# Altium PCB digidisk.PcbDoc
Units mm, origin at the board's own origin, x right, y up, seen from the top; angles counter-clockwise.
Board outline 180 x 80 mm, 2 copper layers (Top Layer, Bottom Layer); 73 components, 52 nets, 238 pads, 37 vias.
Unrouted connection lines stored in the file: 3.
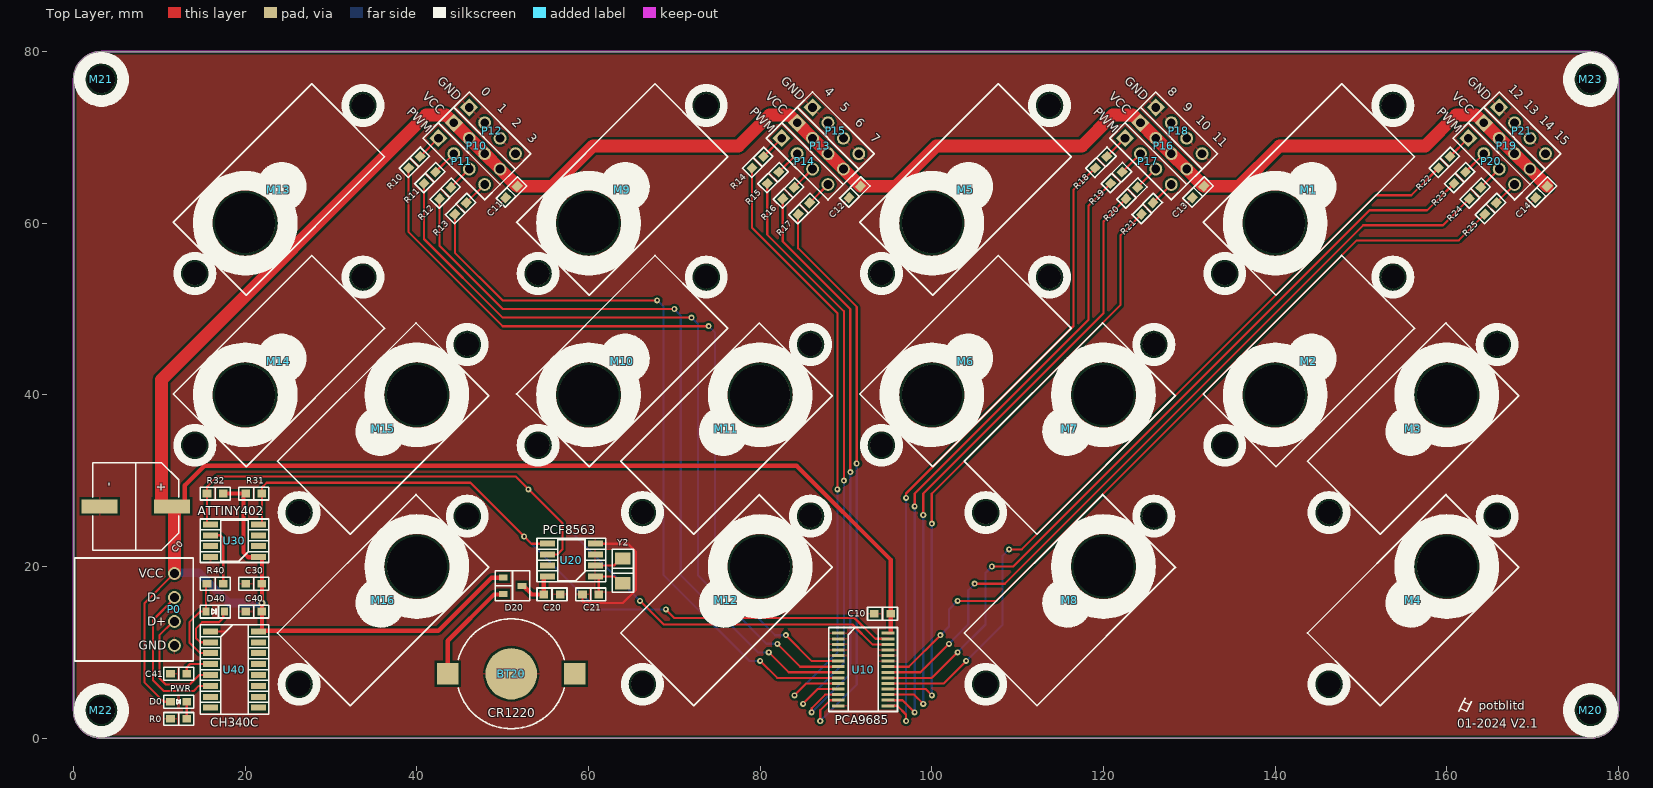
[diagram p0: Top Layer view]
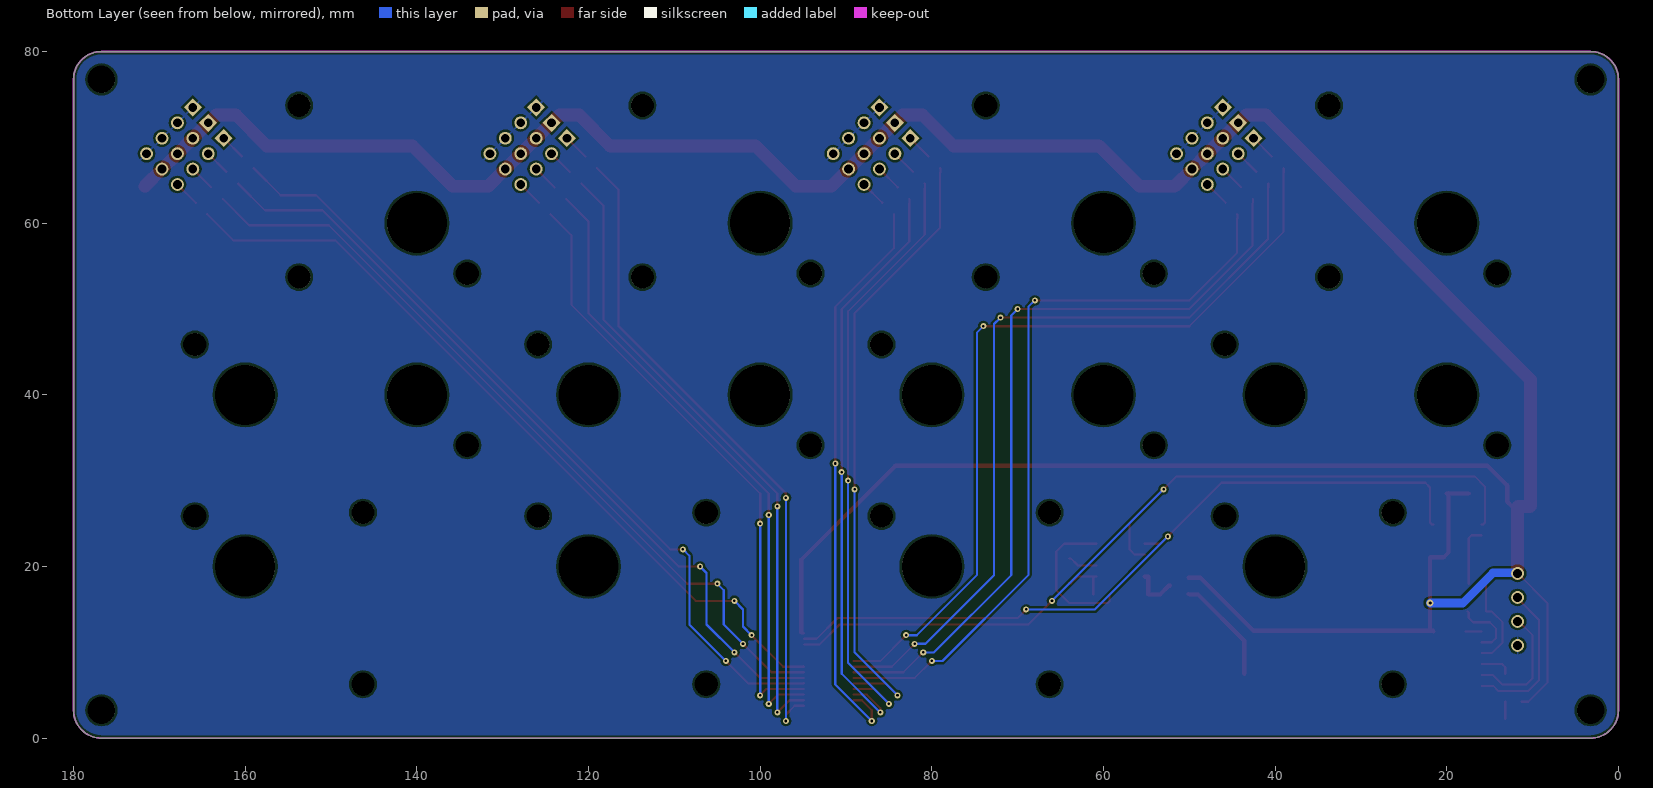
[diagram p1: Bottom Layer view, seen from below]
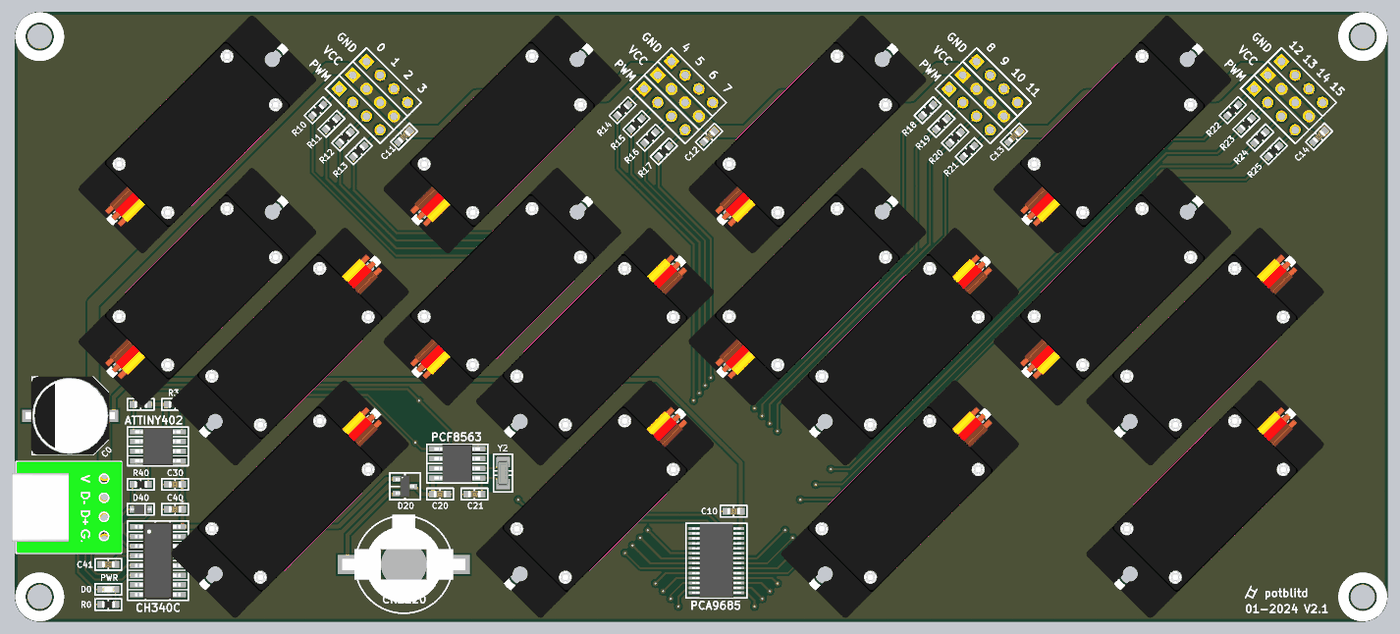
[diagram p2: 3D render of the assembled board from above, using the file's embedded part models]

## Layer stack, top to bottom
Top Solder: solder mask 0.0102, Solder Resist, Dk 3.5
Top Layer: signal copper 0.0356
Dielectric 1: dielectric 0.32, FR-4, Dk 4.8
Bottom Layer: signal copper 0.0356
Bottom Solder: solder mask 0.0102, Solder Resist, Dk 3.5

## Board outline
0,3.25 0,76.75 cw(c3.25,76.75) 3.25,80 176.75,80 cw(c176.75,76.75) 180,76.75 180,3.25 cw(c176.75,3.25) 176.75,0 3.25,0 cw(c3.25,3.25)

## Design rules (kind name [scope] priority, off if disabled: settings)
Clearance [All] p1: gap=0.254 ignorepadtopadclearanceinfootprint=FALSE except(0.15: Text-Text Text-Hole; 0.2: Arc-SMDPad Track-SMDPad)
Height [All] p1: minheight=0 maxheight=60 prefheight=12.7
HoleSize [All] p1: absolutevalues=TRUE maxlimit=30 minlimit=0.025 maxpercent=80.000 minpercent=20.000
MinimumSolderMaskSliver [All] p1: minsoldermaskwidth=0.2
PlaneConnect [All] p1: planeconnectstyle=Relief reliefexpansion=0.508 reliefentries=2 reliefconductorwidth=0.254 reliefairgap=0.254
PolygonConnect [All] p1: connectstyle=Relief reliefconductorwidth=0.254 reliefentries=2 polygonreliefangle="90 Angle" airgapwidth=0.254
RoutingVias [All] p1: holewidth=0.711 width=1.27 viastyle="Through Hole" minholewidth=0.711 minwidth=1.27 maxholewidth=0.711 maxwidth=1.27
SilkToSilkClearance [All] p1: silktosilkclearance=0.15
SilkToSolderMaskClearance [IsPad] p1: minsilkscreentomaskgap=0.15 clearancetoexposedcopper=TRUE
SolderMaskExpansion [All] p1: expansion=0.102 istentingtop=FALSE
Width [All] p1: maxlimit=2 minlimit=0.2 preferedwidth=0.254 minimp=50.000000 maximp=50.000000 favimp=50.000000
24 further rules are at their usual default settings.

## Components (designator, comment, footprint, x,y, rotation, side; value= is the part's Value field where it differs from the comment)
BT20 "CR1220" CR1220-H 51,7.5 r0 top value=3V
C0 "1000u" 10X10.2 7.25,27 r270 top
C10 "Capacitor" 0603CM 94.25,14.5 r180 top value=10u
C11 "Capacitor" 0603CM 51.022,63.634 r225 top value=10u
C12 "Capacitor" 0603CM 91.022,63.634 r225 top value=10u
C13 "Capacitor" 0603CM 131.022,63.634 r225 top value=10u
C14 "Capacitor" 0603CM 171.022,63.634 r225 top value=10u
C20 "Capacitor" 0603CM 55.75,16.75 r0 top value=100n
C21 "Capacitor" 0603CM 60.25,16.75 r180 top value=22p
C30 "Capacitor" 0603CM 21,18 r0 top value=1u
C40 "Capacitor" 0603CM 21,14.75 r180 top value=100n
C41 "Capacitor" 0603CM 12.25,7.5 r180 top value=100n
D0 "LED-B" 0603DM 12.25,4.25 r0 top value=~3V
D20 "BAS40-05" "SOT23-3 M" 51.15,17.75 r270 top value=DD
D40 "NSR0240" "SOD-323 M" 16.5,14.75 r0 top value=SCH-D
M1 "MG90S" HOLE-SG90-2 140,60 r225 top locked
M2 "MG90S" HOLE-SG90-2 140,40 r225 top locked
M3 "MG90S" HOLE-SG90-2 160,40 r45 top locked
M4 "MG90S" HOLE-SG90-2 160,20 r45 top locked
M5 "MG90S" HOLE-SG90-2 100,60 r225 top locked
M6 "MG90S" HOLE-SG90-2 100,40 r225 top locked
M7 "MG90S" HOLE-SG90-2 120,40 r45 top locked
M8 "MG90S" HOLE-SG90-2 120,20 r45 top locked
M9 "MG90S" HOLE-SG90-2 60,60 r225 top locked
M10 "MG90S" HOLE-SG90-2 60,40 r225 top locked
M11 "MG90S" HOLE-SG90-2 80,40 r45 top locked
M12 "MG90S" HOLE-SG90-2 80,20 r45 top locked
M13 "MG90S" HOLE-SG90-2 20,60 r225 top locked
M14 "MG90S" HOLE-SG90-2 20,40 r225 top locked
M15 "MG90S" HOLE-SG90-2 40,40 r45 top locked
M16 "MG90S" HOLE-SG90-2 40,20 r45 top locked
M20 "M3" HOLE-M3-simple 176.75,3.25 r0 top locked value=3.1mm
M21 "M3" HOLE-M3-simple 3.25,76.75 r0 top locked value=3.1mm
M22 "M3" HOLE-M3-simple 3.25,3.25 r0 top locked value=3.1mm
M23 "M3" HOLE-M3-simple 176.75,76.75 r0 top locked value=3.1mm
P0 "USB-C" "USB-C module 2.8mm" 11.75,15 r270 top value=4P
P10 "4P2.54MM" 4P-2.54mm 47,69 r315 top value=4P
P11 "4P2.54MM" 4P-2.54mm 45.204,67.204 r315 top value=4P
P12 "4P2.54MM" 4P-2.54mm 48.796,70.796 r315 top value=4P
P13 "4P2.54MM" 4P-2.54mm 87,69 r315 top value=4P
P14 "4P2.54MM" 4P-2.54mm 85.204,67.204 r315 top value=4P
P15 "4P2.54MM" 4P-2.54mm 88.796,70.796 r315 top value=4P
P16 "4P2.54MM" 4P-2.54mm 127,69 r315 top value=4P
P17 "4P2.54MM" 4P-2.54mm 125.204,67.204 r315 top value=4P
P18 "4P2.54MM" 4P-2.54mm 128.796,70.796 r315 top value=4P
P19 "4P2.54MM" 4P-2.54mm 167,69 r315 top value=4P
P20 "4P2.54MM" 4P-2.54mm 165.204,67.204 r315 top value=4P
P21 "4P2.54MM" 4P-2.54mm 168.796,70.796 r315 top value=4P
R0 "Resistor" 0603RM 12.25,2.25 r0 top value=100
R10 "Resistor" 0603RM 39.71,67.098 r225 top value=220
R11 "Resistor" 0603RM 41.506,65.302 r225 top value=220
R12 "Resistor" 0603RM 43.302,63.506 r225 top value=220
R13 "Resistor" 0603RM 45.098,61.71 r225 top value=220
R14 "Resistor" 0603RM 79.71,67.098 r225 top value=220
R15 "Resistor" 0603RM 81.506,65.302 r225 top value=220
R16 "Resistor" 0603RM 83.302,63.506 r225 top value=220
R17 "Resistor" 0603RM 85.098,61.71 r225 top value=220
R18 "Resistor" 0603RM 119.71,67.098 r225 top value=220
R19 "Resistor" 0603RM 121.506,65.302 r225 top value=220
R20 "Resistor" 0603RM 123.302,63.506 r225 top value=220
R21 "Resistor" 0603RM 125.098,61.71 r225 top value=220
R22 "Resistor" 0603RM 159.71,67.098 r225 top value=220
R23 "Resistor" 0603RM 161.506,65.302 r225 top value=220
R24 "Resistor" 0603RM 163.302,63.506 r225 top value=220
R25 "Resistor" 0603RM 165.098,61.71 r225 top value=220
R31 "Resistor" 0603RM 21,28.5 r180 top value=10k
R32 "Resistor" 0603RM 16.5,28.5 r0 top value=10k
R40 "Resistor" 0603RM 16.5,18 r180 top value=470
U10 "PCA9685" "TSSOP-28 M" 92,8 r0 top value=TSSOP-28
U20 "PCF8563" "SOP-8 M" 58,20.75 r90 top value=SOP-8
U30 "ATtiny402" "SOP-8 M" 18.75,23 r90 top value=SOP-8
U40 "CH340C" "SOP-16 M" 18.75,8 r270 top value=USB-TTL
Y2 "Oscillator" "FC135 M" 64,19.5 r270 top value=32.768kHz

## Footprints (in the part's own frame and the unit in brackets; to place one, negate y for a bottom-side part, rotate by r counter-clockwise, add the part's x,y. Pads: shape width x height; smd on the part's side, far side on the other; paste and mask are expansions set on the pad)
4P-2.54mm [mm] "4-pin 2.54mm thru hole general footprint"
  rect 1.5x1.5 hole 1.02 mask+0.05: 1(-3.81,0)
  round 1.5 hole 1.02 mask+0.05: 2(-1.27,0) 3(1.27,0) 4(3.81,0)
  silkscreen extent -5.08,-1.27 5.08,1.27
10X10.2 [mm] "Electrolytic capacitor d10-h10.2 general footprint"
  rect 1.6x4.2 smd mask+0.05: 1(0,4.2) 2(0,-4.2)
  silkscreen extent -5.1,-5 5.1,5, body extent -5.15,-5.85 5.15,5.85, height 10.3
0603CM [mm] "0603 capacitor for manual soldering"
  rect 1x0.9 smd mask+0.05: 1(-0.95,0) 2(0.95,0)
  silkscreen extent -1.75,-0.75 1.75,0.75, body extent -0.85,-0.45 0.85,0.45, height 0.9
0603DM [mm] "0603/1608 SMD LED general footprint"
  rect 1x0.9 smd mask+0.05: 1(-0.95,0) 2(0.95,0)
  silkscreen extent -1.75,-0.75 1.75,0.75, body extent -0.8,-0.4 0.8,0.4, height 0.55
0603RM [mm] "0603 resistor for manual soldering"
  rect 1x0.9 smd mask+0.05: 1(-0.95,0) 2(0.95,0)
  silkscreen extent -1.75,-0.75 1.75,0.75, body extent -0.85,-0.45 0.85,0.45, height 0.55
CR1220-H [mm] "CR1220 SMD battery holder"
  rect 2.5x2.5 smd mask+0.05: 1(-7.4,0) 1(7.4,0)
  round 6 smd mask+0.05: 2(0,0)
  silkscreen extent -6.18,-6.4 6.18,6.4, body extent -8.08,-5 8.08,6.55, height 2.3
"FC135 M" [mm] "1206 oscillator for manual soldering"
  rect 1.4x1.8 smd mask+0.05: 1(-1.45,0) 2(1.45,0)
  silkscreen extent -2.5,-1.25 2.5,1.25, body extent -1.6,-0.75 1.6,0.75, height 0.9
HOLE-M3-simple [mm] "Hole for M3 screw"
  round 3.1 hole 3.2 mask+0.05: 1(0,0)
HOLE-SG90-2 [mm]
  round 2.6 hole 2.7 unplated mask+0: 1(-19.4,0) 1(8.3,0)
  round 6.9 hole 7 unplated mask+0: 1(0,0)
  silkscreen extent -21.45,-6 10.35,6, body extent -21.8,-6.15 10.7,6.15, height 28.39
"SOD-323 M" [mm] "Diode footprint"
  rect 0.8x0.9 smd mask+0.05: 1(-1.075,0) 2(1.075,0)
  silkscreen extent -1.75,-0.75 1.75,0.75, body extent -1.34,-0.65 1.34,0.65, height 1.15
"SOP-8 M" [mm] "SOP-8 for manual soldering"
  rect 0.7x1.75 smd mask+0.05: 1(-1.905,-2.8) 2(-0.635,-2.8) 3(0.635,-2.8) 4(1.905,-2.8) 5(1.905,2.8) 6(0.635,2.8) 7(-0.635,2.8) 8(-1.905,2.8)
  silkscreen extent -2.54,-4 2.54,4, body extent -2.45,-3 2.45,3, height 1.75
"SOP-16 M" [mm]
  rect 0.7x1.75 smd mask+0.05: 1(-4.445,-2.8) 2(-3.175,-2.8) 3(-1.905,-2.8) 4(-0.635,-2.8) 5(0.635,-2.8) 6(1.905,-2.8) 7(3.175,-2.8) 8(4.445,-2.8) 9(4.445,2.8) 10(3.175,2.8) 11(1.905,2.8) 12(0.635,2.8) 13(-0.635,2.8) 14(-1.905,2.8) 15(-3.175,2.8) 16(-4.445,2.8)
  silkscreen extent -5.2,-4 5.2,4, body extent -5,-3 5,3, height 1.8
"SOT23-3 M" [mm] "SOT23-3 for manual soldering"
  rect 0.7x1 smd mask+0.05: 1(-0.95,-1.1) 2(0.95,-1.1) 3(0,1.1)
  silkscreen extent -1.75,-2 1.75,2, body extent -1.45,-1.2 1.45,1.2, height 1.1
"TSSOP-28 M" [mm]
  rect 1.5x0.35 smd mask+0.01: 1(-2.9,4.225) 2(-2.9,3.575) 3(-2.9,2.925) 4(-2.9,2.275) 5(-2.9,1.625) 6(-2.9,0.975) 7(-2.9,0.325) 8(-2.9,-0.325) 9(-2.9,-0.975) 10(-2.9,-1.625) 11(-2.9,-2.275) 12(-2.9,-2.925) 13(-2.9,-3.575) 14(-2.9,-4.225) 15(2.9,-4.225) 16(2.9,-3.575) 17(2.9,-2.925) 18(2.9,-2.275) 19(2.9,-1.625) 20(2.9,-0.975) 21(2.9,-0.325) 22(2.9,0.325) 23(2.9,0.975) 24(2.9,1.625) 25(2.9,2.275) 26(2.9,2.925) 27(2.9,3.575) 28(2.9,4.225)
  silkscreen extent -4,-4.9 4,4.9, body extent -3.2,-4.85 3.2,4.85, height 1.1
"USB-C module 2.8mm" [mm]
  round 1.5 hole 1.02 mask+0.05: 1(-4.2,0) 2(-1.4,0) 3(1.4,0) 4(4.2,0)
  silkscreen extent -6,-11.6 6,2.2, body extent -6,-12.13 6,2.23, height 4

## Part data
BT20: library part "Battery 3V", "Coin cell battery 3V", Component=CR1220
C0: library part PCapacitor, "Electrolytic Capacitor", Component=Cap10x10.2
C10 C11 C12 C13 C14: "Capacitor 10u", Component=Cap0603
C20 C40 C41: "Capacitor 100nF ±10% 50V", Component=Cap0603
C21: "Capacitor 22pF ±5% 50V", Component=Cap0603
C30: "Capacitor 1uF", Component=Cap0603
D0: "General LED symbol", Component=LED-B
D20: library part "Dual Diode 2", "General symbol for a dual diode", Component=BAS40-05
D40: library part "Schottky Diode", "Schottky Barrier Rectifiers", Component=NSR0240
M1 M2 M3 M4 M5 M6 M7 M8 M9 M10 M11 M12 M13 M14 M15 M16 M20 M21 M22 M23: library part "Mounting Hole noGD", "Genreal symbol for mechanical mounting hole"
  M1 M2 M3 M4 M5 M6 M7 M8 M9 M10 M11 M12 M13 M14 M15 M16: Component=MG90S
  M20 M21 M22 M23: Component=M3
P0 P10 P11 P12 P13 P14 P15 P16 P17 P18 P19 P20 P21: library part "4-pins Header", "General 4-pin connection"
  P0: Component=4P-2.54MM
  P10 P11 P12 P13 P14 P15 P16 P17 P18 P19 P20 P21: Component=4P2.54MM
R0 R10 R11 R12 R13 R14 R15 R16 R17 R18 R19 R20 R21 R22 R23 R24 R25 R31 R32 R40: library part RES, Component=Res0603
U10: "16-channel, 12-bit PWM Fm+ I2C-bus LED controller", Component=PCA9685
U20: library part RTC-8563, "IC real-time clock with alarm interrupt", Component=PCF8563T
U30: library part ATtiny202/402, "tiny AVR 8-pin microcontroller", Component=ATtiny402
U40: library part CH340C-A, "USB to serial", Component=CH340C
Y2: library part XO-2, "Crystal oscillator 32.768kHz 20ppm 12.5pF", Component=FC135

## Via types
v1: diameter 0.7, hole 0.3, Top Layer to Bottom Layer, tented both sides, 36 vias
v2: diameter 0.8, hole 0.4, Top Layer to Bottom Layer, tented both sides, 1 vias

## Nets (pads, with @x,y where several pads share a name; then routed paths per layer and width w, separated by ;. In a path a pad name is that pad's centre, name@x,y a point inside that pad or via, vN(x,y) a via of type N, cw(c..) or ccw(c..) an arc to the next point about the centre after c; other vN are vias at no path point)
5V: C0.1 C10.1 C11.1 C12.1 C13.1 C14.1 C30.2 C40.1 D0.1 D20.1 P0.1 P10.1 P10.2 P10.3 P10.4 P13.1 P13.2 P13.3 P13.4 P16.1 P16.2 P16.3 P16.4 P19.1 P19.2 P19.3 P19.4 R31.2 R32.2 U10.28 U30.1 U40.16 | length 403.6
  Top Layer w0.25: U10.28 U10.28@95.15,12.225
  Top Layer w0.254: D0.1 10.5,4.25 8.25,6.5 8.25,15.7 P0.1@11.75,19.2
  Top Layer w0.5: C0.1 11.7,27 12.407,27 12.957,27.55 12.957,29.457 15.25,31.75 84.25,31.75 95.2,20.8 C10.1 U10.28@95.2,12.3 ; R32.2 R31.2@19.8,28.5 ; R31.2@19.8,28.55 R31.2@19.8,28.5 ; U40.16 21.605,12.5 U40.16@21.905,12.5 ; U30.1@21.95,21.045 U30.1@21.95,20.995 ; D20.1 48.7,18.7 42.5,12.5 U40.16@21.905,12.5 ; R31.2@19.8,28.3 R31.2@19.8,28.5 ; R31.2@19.8,28.3 19.8,21.64 20.345,21.095 U30.1 21.85,21.095 U30.1@21.95,20.995 ; R31.2@19.8,28.3 20,28.5 R31.2@19.8,28.5 ; U40.16@21.905,12.5 21.95,12.545 C40.1 v2(21.95,15.75) C30.2 U30.1@21.95,20.995
  Top Layer w1.5: C0.1 10.3,27 10.25,27.05 10.25,41.765 41.077,72.592 43.408,72.592 P10.1 P10.2 P10.3 P10.4 C11.1 ; C0.1@11.7,27 11.75,26.95 P0.1 ; C11.1 55.809,64.306 60.504,69 77.485,69 81.077,72.592 83.408,72.592 P13.1 P13.2 P13.3 P13.4 C12.1@91.694,64.306 ; C12.1 95.82,64.306 ; 95.879,64.375 95.89,64.375 100.515,69 117.485,69 121.077,72.592 123.408,72.592 P16.1 P16.2 P16.3 P16.4 C13.1 ; C13.1 135.809,64.306 140.504,69 157.485,69 161.077,72.592 163.408,72.592 P19.1 P19.2 P19.3 P19.4 C14.1
  Bottom Layer w1: P0.1 11.8,19.25 14.62,19.25 18.12,15.75 v2(21.95,15.75)
CLK: U20.7
D+: P0.3 U40.5 | length 14.1
  Top Layer w0.254: P0.3 11.6,13.6 10,12 10,7 10.75,6.25 13.536,6.25 14.651,7.365 U40.5
D-: P0.2 U40.6 | length 18
  Top Layer w0.254: P0.2@11.75,16.27 9.25,13.77 9.25,6.75 10.5,5.5 14,5.5 14.595,6.095 U40.6
GND: BT20.2 C0.2 C10.2 C11.2 C12.2 C13.2 C14.2 C20.2 C21.2 C30.1 C40.2 C41.2 P0.4 P12.1 P12.2 P12.3 P12.4 P15.1 P15.2 P15.3 P15.4 P18.1 P18.2 P18.3 P18.4 P21.1 P21.2 P21.3 P21.4 R0.1 U10.1 U10.2 U10.3 U10.4 U10.5 U10.14 U10.23 U10.24 U10.25 U20.4 U30.8 U40.1 | length 19.1
  Top Layer w0.254: U40.1 17.795,12.445 ; C21.2 59.3,15.942 59.492,15.75 64,15.75 65.5,17.25 65.5,21.75 64.595,22.655 U20.4
INT: U20.3
NetBT20_1: BT20.1 D20.2 | length 12.6
  Top Layer w0.5: BT20.1@43.6,7.5 43.6,11.35 49,16.75 50,16.75 D20.2
NetC21_1: C21.1 U20.1 Y2.2 | length 5.7
  Top Layer w0.254: U20.1 U20.1@60.977,18.845 ; C21.1 61.2,18.622 U20.1@60.977,18.845 ; Y2.2 63.8,18.05 63.005,18.845 U20.1@60.977,18.845
NetD0_2: D0.2 R0.2 | length 2
  Top Layer w0.254: R0.2 D0.2
NetP11_1: P11.1 R10.1 | length 3
  Top Layer w0.254: R10.1 P11.1
NetP11_2: P11.2 R11.1 | length 3
  Top Layer w0.254: R11.1 P11.2
NetP11_3: P11.3 R12.1 | length 3
  Top Layer w0.254: R12.1 P11.3
NetP11_4: P11.4 R13.1 | length 3
  Top Layer w0.254: R13.1 P11.4
NetP14_1: P14.1 R14.1 | length 3
  Top Layer w0.254: R14.1 P14.1
NetP14_2: P14.2 R15.1 | length 3
  Top Layer w0.254: R15.1 P14.2
NetP14_3: P14.3 R16.1 | length 3
  Top Layer w0.254: R16.1 P14.3
NetP14_4: P14.4 R17.1 | length 3
  Top Layer w0.254: R17.1 P14.4
NetP17_1: P17.1 R18.1 | length 3
  Top Layer w0.254: R18.1 P17.1
NetP17_2: P17.2 R19.1 | length 3
  Top Layer w0.254: R19.1 P17.2
NetP17_3: P17.3 R20.1 | length 3
  Top Layer w0.254: R20.1 P17.3
NetP17_4: P17.4 R21.1 | length 3
  Top Layer w0.254: R21.1 P17.4
NetP20_1: P20.1 R22.1 | length 3
  Top Layer w0.254: R22.1 P20.1
NetP20_2: P20.2 R23.1 | length 3
  Top Layer w0.254: R23.1 P20.2
NetP20_3: P20.3 R24.1 | length 3
  Top Layer w0.254: R24.1 P20.3
NetP20_4: P20.4 R25.1 | length 3
  Top Layer w0.254: R25.1 P20.4
NetU20_2: U20.2 Y2.1 | length 3.5
  Top Layer w0.254: U20.2 62.965,20.115 63.8,20.95 Y2.1
PA3: U30.7
PA6: U30.2
PA7: U30.3
PWM0: R10.2 U10.6 | length 94.8
  Top Layer w0.254: R10.2 39.003,66.391 39.003,65.934 39.038,65.899 39.038,58.962 50,48 v1(74,48) ; v1(83,12) 86.025,8.975 U10.6
  Bottom Layer w0.254: v1(74,48) 74.75,47.25 74.75,19 81.75,12 v1(83,12)
PWM1: R11.2 U10.7 | length 92.5
  Top Layer w0.254: R11.2 40.799,64.595 40.799,64.138 40.834,64.103 40.834,58.166 50,49 v1(72,49) ; v1(82,11) 84.675,8.325 U10.7
  Bottom Layer w0.254: v1(72,49) 72.75,48.25 72.75,19 80.71,11.04 ; 80.75,11 v1(82,11)
PWM2: R12.2 U10.8 | length 90.3
  Top Layer w0.254: R12.2 42.595,62.799 42.595,62.342 42.63,62.307 42.63,57.37 50,50 v1(70,50) ; v1(81,10) 83.325,7.675 U10.8
  Bottom Layer w0.254: v1(70,50) 70.75,49.25 70.75,19 79.75,10 v1(81,10)
PWM3: R13.2 U10.9 | length 88
  Top Layer w0.254: R13.2 44.391,61.003 44.391,60.546 44.426,60.51 44.426,56.574 50,51 v1(68,51) ; v1(80,9) 81.975,7.025 U10.9
  Bottom Layer w0.254: v1(68,51) 68.75,50.25 68.75,19 78.75,9 v1(80,9)
PWM4: R14.2 U10.10 | length 73.3
  Top Layer w0.254: R14.2 79.003,66.391 79.003,65.934 79.038,65.899 79.038,59.462 89,49.5 v1(89,29) ; v1(84,5) 85.375,6.375 U10.10
  Bottom Layer w0.254: v1(84,5) 89,10 v1(89,29)
PWM5: R15.2 U10.11 | length 71.1
  Top Layer w0.254: R15.2 80.799,64.595 80.799,64.138 80.834,64.103 80.834,58.666 89.75,49.75 v1(89.75,30) ; v1(85,4) 86.725,5.725 U10.11
  Bottom Layer w0.254: v1(85,4) 89.75,8.75 v1(89.75,30)
PWM6: R16.2 U10.12 | length 69.2
  Top Layer w0.254: R16.2 82.595,62.799 82.595,62.342 82.63,62.307 82.63,57.87 90.5,50 v1(90.5,31) ; v1(86,3) 86,3.5 87.575,5.075 U10.12
  Bottom Layer w0.254: v1(86,3) 90.5,7.5 v1(90.5,31)
PWM7: R17.2 U10.13 | length 67.5
  Top Layer w0.254: R17.2 84.391,61.003 84.391,60.546 84.426,60.51 84.426,57.074 91.25,50.25 v1@91.25,32.022 ; v1(87,2) 87,3.25 88.16,4.41 89.085,4.41 U10.13
  Bottom Layer w0.254: v1(87,2) 91.25,6.25 v1@91.25,32.022
  other v1: 91.25,32
PWM8: R18.2 U10.15 | length 76.8
  Top Layer w0.254: U10.15 95.975,3.775 97,2.75 v1(97,2) ; v1(97,28) 97,28.515 116.5,48.015 116.5,63.888 R18.2
  Bottom Layer w0.254: v1(97,2) v1(97,28)
PWM9: R19.2 U10.16 | length 74.8
  Top Layer w0.254: U10.16 96.575,4.425 v1(98,3) ; v1(98,27) 98,28.5 118.25,48.75 118.25,62.046 R19.2
  Bottom Layer w0.254: v1(98,3) v1(98,27)
PWM10: R20.2 U10.17 | length 73.2
  Top Layer w0.254: U10.17 97.925,5.075 v1(99,4) ; v1(99,26) 99,28.508 120,49.508 120,60.204 R20.2
  Bottom Layer w0.254: v1(99,4) v1(99,26)
PWM11: R21.2 U10.18 | length 71.6
  Top Layer w0.254: U10.18 99.275,5.725 v1(100,5) ; v1(100,25) 100,28.485 122,50.485 122,58.612 R21.2
  Bottom Layer w0.254: v1(100,5) v1(100,25)
PWM12: R22.2 U10.19 | length 93.8
  Top Layer w0.254: U10.19@94.948,6.423 U10.19 101.375,6.375 v1(104,9) ; v1(109,22) 110.485,22 151.735,63.25 155.862,63.25 R22.2
  Bottom Layer w0.254: v1(104,9) 108.25,13.25 108.25,21.25 v1(109,22)
PWM13: R23.2 U10.20 | length 93.3
  Top Layer w0.254: U10.20 100.025,7.025 v1(103,10) ; v1(107,20) 109.5,20 151,61.5 157.704,61.5 R23.2
  Bottom Layer w0.254: v1(103,10) 106.25,13.25 106.25,19.25 v1(107,20)
PWM14: R24.2 U10.21 | length 92.9
  Top Layer w0.254: U10.21 98.675,7.675 v1(102,11) ; v1(105,18) 108.5,18 150.25,59.75 159.546,59.75 R24.2
  Bottom Layer w0.254: v1(102,11) 104.25,13.25 104.25,17.25 v1(105,18)
PWM15: R25.2 U10.22 | length 92.6
  Top Layer w0.254: U10.22@94.948,8.373 U10.22 97.325,8.325 v1(101,12) ; v1(103,16) 107.515,16 149.515,58 161.388,58 R25.2
  Bottom Layer w0.254: v1(101,12) 102,13 102,15 v1(103,16)
RXD: D40.1 R40.2 U40.3 | length 11
  Top Layer w0.254: R40.2@15.425,18 D40.1 14.75,14.75 13.5,13.5 13.5,11.155 14.75,9.905 U40.3
SCL: R32.1 U10.26 U20.6 U30.5 | length 103.3
  Top Layer w0.254: U30.5 15.773,24.905 15.55,25.128 15.55,29.3 16.75,30.5 51.5,30.5 v1(53,29) 56.969,25.031 56.969,22 56.354,21.385 U20.6 ; v1(66,16) 68.75,13.25 90.75,13.25 93.075,10.925 U10.26
  Bottom Layer w0.254: v1(53,29) v1@65.996,16.004
SDA: R31.1 U10.27 U20.5 U30.4 | length 88.3
  Top Layer w0.254: U30.4 21.727,24.905 21.95,25.128 R31.1 21.95,29.2 22.5,29.75 46.25,29.75 v1(52.5,23.5) 53.345,22.655 U20.5 ; v1(69,15) 70,14 91,14 93.425,11.575 U10.27
  Bottom Layer w0.254: v1(52.5,23.5) 61,15 v1(69,15)
TXD: D40.2 U40.2 | length 7.5
  Top Layer w0.254: U40.2 14.75,11.175 14.25,11.675 14.25,12.75 15,13.5 16.954,13.5 17.454,14 17.454,14.629 D40.2
UPDI: R40.1 U30.6 | length 6.9
  Top Layer w0.254: U30.6 17.134,23.635 17.45,23.319 R40.1
V3: C41.1 U40.4 | length 3.7
  Top Layer w0.254: C41.1 13.2,8.26 13.575,8.635 U40.4
VDD: C20.1 D20.3 U20.8 | length 5.2
  Top Layer w0.5: D20.3 52.4,17.75 53.4,16.75 C20.1 U20.8@54.8,18.799 ; U20.8@54.99,18.812 55.167,18.812 U20.8
pads on no net: M1.1 M2.1 M3.1 M4.1 M5.1 M6.1 M7.1 M8.1 M9.1 M10.1 M11.1 M12.1 M13.1 M14.1 M15.1 M16.1 M20.1 M21.1 M22.1 M23.1 U40.7 U40.8 U40.9 U40.10 U40.11 U40.12 U40.13 U40.14 U40.15

## Polygon pours and split planes (outlines as drawn)
GND on Top Layer "GND_L01_P005" (solid, remove dead copper, pour order 5): 0,0 180,0 180,80 0,80
no net on Top Layer "NONET_L01_P004" (solid, pour order 4): 60.8,22.02 61.509,22.02 65.25,22 65.25,17 61.954,17 60.8,17
GND on Top Layer "GND_L01_P001" (solid, pour order 1): 61.759,23.25 56.5,23.25 56.4,23.15 56.4,17.888 55.75,17.238 55.75,16 60.25,16 60.25,17.25 59.6,17.9 59.6,22.02 61.759,22.02
GND on Bottom Layer "GND_L02_P003" (solid, remove dead copper, pour order 3): 0,0 180,0 180,80 0,80

## Keep-outs
Keep-Out Layer:
  the board outline again, w0.2

## Other copper
Top Layer:
  pour cut-out: 60.8,22.02 65.23,22.02 65.25,22 65.25,17 60.75,17

## Silkscreen, mask and mechanical layers (free items; w line width, h text height)
Top Overlay:
  circle w0.2: c176.75,76.75 r3.1
  circle w1.25: c176.75,76.75 r2.475
  circle w0.2: c176.75,3.25 r3.1
  circle w1.25: c176.75,3.25 r2.475
  circle w0.2: c3.25,3.25 r3.1
  circle w1.25: c3.25,3.25 r2.475
  circle w1.25: c3.25,76.75 r2.475
  circle w0.2: c3.25,76.75 r3.1
  lines w0.2: 161.375,3.125 161.563,3.5 ; 162.125,4.625 161.938,4.25 ; 162.875,4.25 162.688,3.875 ; 161.563,3.5 162.312,3.125 162.688,3.875 ; 161.563,3.5 161.938,4.25 ; 161.938,4.25 162.688,3.875
  text "GND" at 42.34,76.488 h1 r315
  text "GND" at 82.34,76.488 h1 r315
  text "GND" at 122.34,76.488 h1 r315
  text "GND" at 162.34,76.488 h1 r315
  text "12" at 167.099,75.548 h1 r315
  text "0" at 47.394,75.253 h1 r315
  text "4" at 87.394,75.253 h1 r315
  text "8" at 127.394,75.253 h1 r315
  text "VCC" at 40.544,74.692 h1 r315
  text "VCC" at 80.544,74.692 h1 r315
  text "VCC" at 120.544,74.692 h1 r315
  text "VCC" at 160.544,74.692 h1 r315
  text "13" at 168.895,73.752 h1 r315
  text "5" at 89.19,73.457 h1 r315
  text "9" at 129.19,73.457 h1 r315
  text "1" at 49.308,73.339 h1 r315
  text "PWM" at 38.748,72.896 h1 r315
  text "PWM" at 78.748,72.896 h1 r315
  text "PWM" at 118.748,72.896 h1 r315
  text "PWM" at 158.748,72.896 h1 r315
  text "10" at 130.691,71.956 h1 r315
  text "14" at 170.691,71.956 h1 r315
  text "2" at 50.986,71.661 h1 r315
  text "6" at 90.986,71.661 h1 r315
  text "15" at 172.487,70.159 h1 r315
  text "11" at 132.605,70.042 h1 r315
  text "3" at 52.782,69.865 h1 r315
  text "7" at 92.782,69.865 h1 r315
  text "ATTINY402" at 14.501,25.95 h1
  text "PCF8563" at 54.668,23.74 h1
  text "PWR" at 11.25,5.4 h0.75
  text "potblitd" at 163.7,3.283 h1
  text "CR1220" at 48.251,2.45 h1
  text "PCA9685" at 88.668,1.65 h1
  text "CH340C" at 15.918,1.35 h1
  text "01-2024 V2.1" at 161.2,1.2 h1

## Text inside footprints (layer, text, board x,y; h text height)
C0: Top Overlay "-" at 3.75,29.833 h1 r270; Top Overlay "+" at 9.75,29.833 h1 r270
P0: Top Overlay "GND" at 7.614,10.3 h1; Top Overlay "D+" at 8.614,13.1 h1; Top Overlay "D-" at 8.614,15.9 h1; Top Overlay "VCC" at 7.614,18.7 h1